# EAGLE board Pinscape Pico Expansion Board - DIY Friendly Power - SMD Sockets (EAGLE 7.7.0)
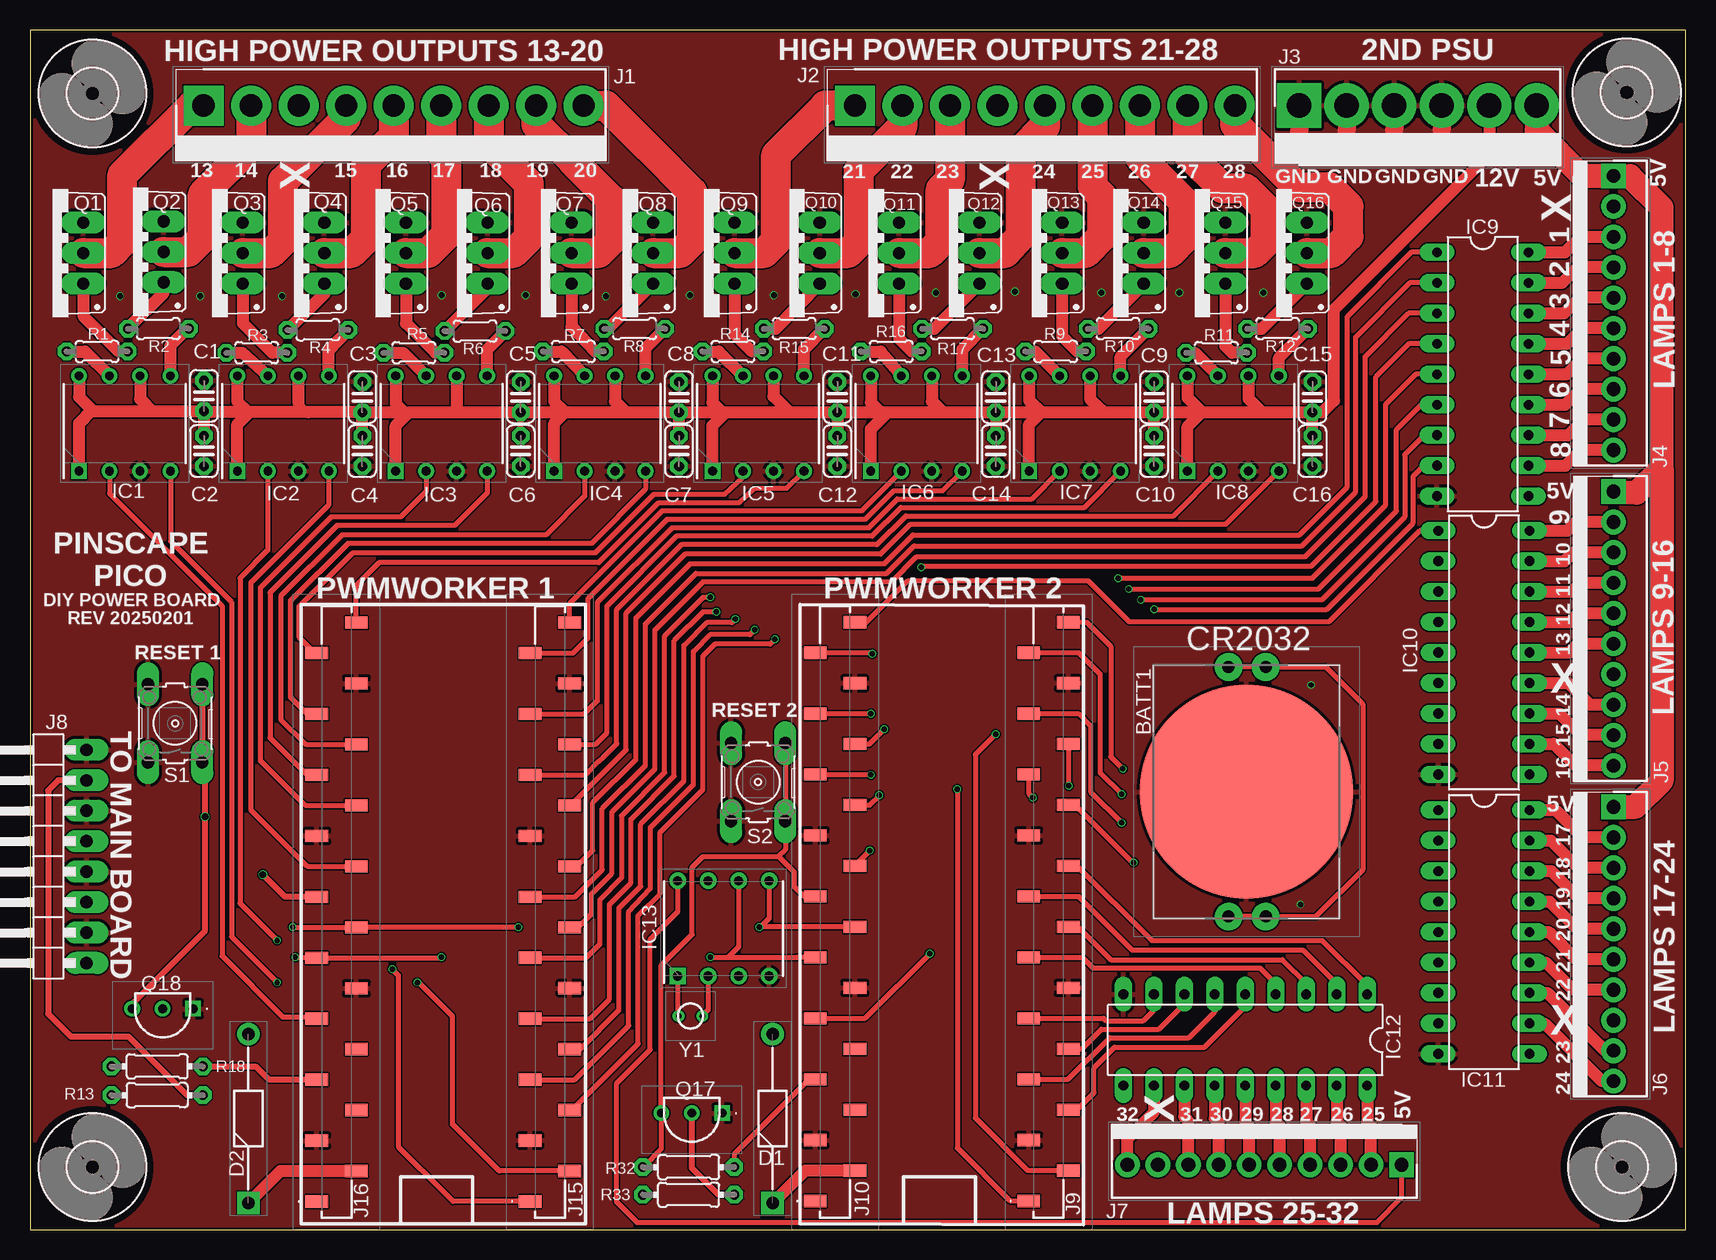
[diagram p0: board, top side]
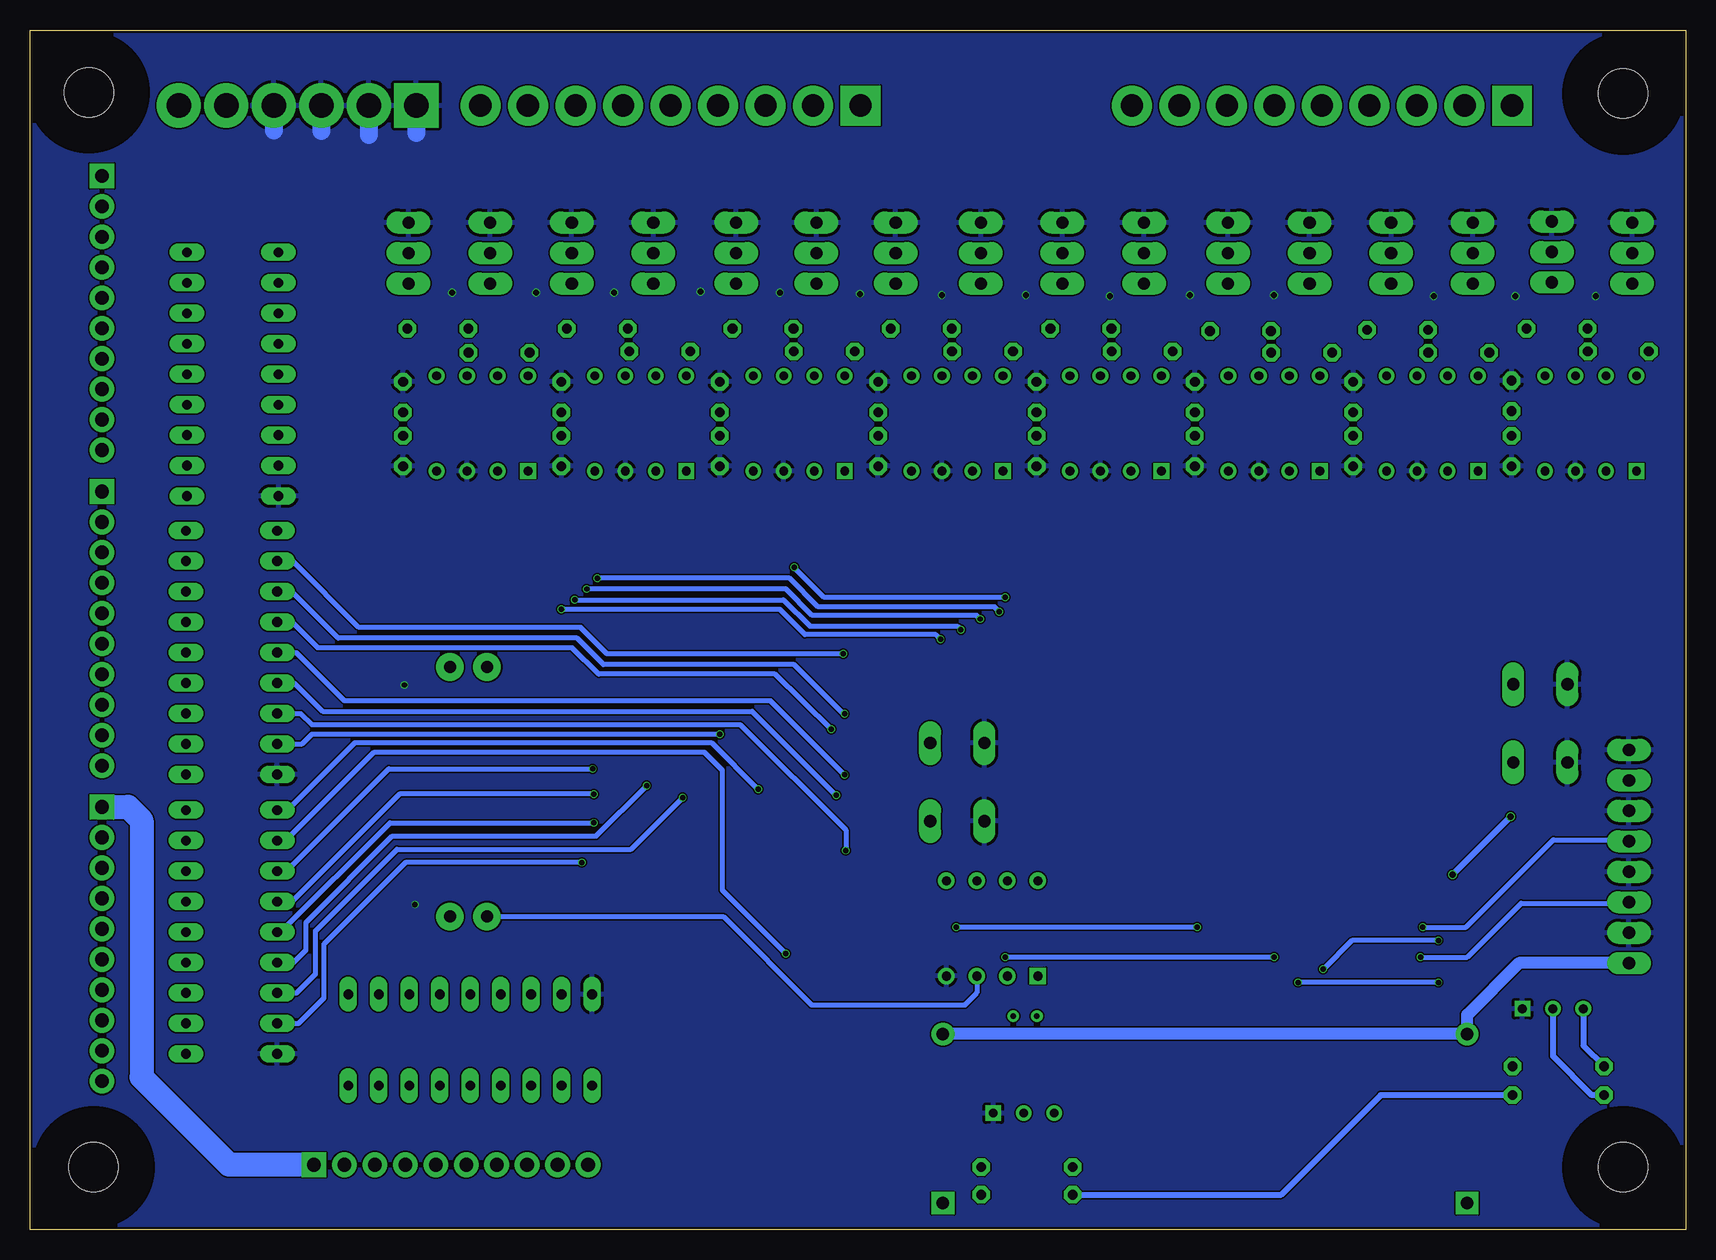
[diagram p1: board, bottom side, seen from below]

Size 138 x 100 mm. Coordinates in mm from the lower left corner, seen from the top.
Outline: 0,0 138,0 138,100 0,100 0,0
Copper layers (1*16): Top 0.035mm / dielectric 1.6mm / Bottom 0.035mm
Design rules "jlcpcb-2layers": minimum track width 5mil, minimum drill 0.3mm, track to track 5mil, track to pad 5mil, pad to pad 5mil, via to via 5mil, smd to smd 5mil, copper to edge 0.2mm, drill to drill 6mil, minimum pad ring 10mil, minimum via ring 3mil, stop-mask expansion 4mil, vias tented up to drill 0mil, thermal gap 10mil

## Footprints (pad centres in the part's own frame; a part is rotated, then mirrored left to right if it is on the bottom)
BATHLD001THM = drill 1 pad 2.3: 1 -10.4,1.5; 2 -10.4,-1.6; 3 10.4,-1.6; 4 10.4,1.5 | smd 17.8 x 17.8: 5 0,0
C025-024X044 = drill 0.813 octagon: 1 -1.27,0; 2 1.27,0
DIOAD1408W86L464D236 = drill 1.05 pad 1.575 square: 1 0,0 | drill 1.05 pad 1.575: 2 14.1,0
DIP794W53P254L959H508Q8N = drill 0.73 pad 1.13 square: 1 -3.97,3.81 | drill 0.73 pad 1.13: 2 -3.97,1.27; 3 -3.97,-1.27; 4 -3.97,-3.81; 5 3.97,-3.81; 6 3.97,-1.27; 7 3.97,1.27; 8 3.97,3.81
DIL18 = drill 0.813 long: 1 -10.16,-3.81; 2 -7.62,-3.81; 3 -5.08,-3.81; 4 -2.54,-3.81; 5 0,-3.81; 6 2.54,-3.81; 7 5.08,-3.81; 8 7.62,-3.81; 9 10.16,-3.81; 10 10.16,3.81; 11 7.62,3.81; 12 5.08,3.81; 13 2.54,3.81; 14 0,3.81; 15 -2.54,3.81; 16 -5.08,3.81; 17 -7.62,3.81; 18 -10.16,3.81
DIP794W56P254L938H457Q8N = drill 0.76 pad 1.16 square: 1 -3.97,3.81 | drill 0.76 pad 1.16: 2 -3.97,1.27; 3 -3.97,-1.27; 4 -3.97,-3.81; 5 3.97,-3.81; 6 3.97,-1.27; 7 3.97,1.27; 8 3.97,3.81
SHDR9W117P0X396_1X9_3566X762X1 = drill 1.85 pad 2.775 square: 1 15.84,0 | drill 1.85 pad 2.775: 2 11.878,0; 3 7.916,0; 4 3.954,0; 5 -0.008,0; 6 -3.97,0; 7 -7.932,0; 8 -11.894,0; 9 -15.856,0
SHDR6W183P0X396_1X6_2377X762X1 = drill 2.05 pad 3.075 square: 1 0,0 | drill 2.05 pad 3.075: 2 3.96,0; 3 7.92,0; 4 11.88,0; 5 15.84,0; 6 19.8,0
SHDR10W66P0X254_1X10_2540X572X = drill 1.15 pad 1.725 square: 1 11.43,0 | drill 1.15 pad 1.725: 2 8.89,0; 3 6.35,0; 4 3.81,0; 5 1.27,0; 6 -1.27,0; 7 -3.81,0; 8 -6.35,0; 9 -8.89,0; 10 -11.43,0
1X08/90 = drill 1.016 long: 1 -8.89,-3.81; 2 -6.35,-3.81; 3 -3.81,-3.81; 4 -1.27,-3.81; 5 1.27,-3.81; 6 3.81,-3.81; 7 6.35,-3.81; 8 8.89,-3.81
M20-7862042-B = smd 1.02 x 1.9: 1 -24.13,1.65; 2 -21.59,-1.65; 3 -19.05,1.65; 4 -16.51,-1.65; 5 -13.97,1.65; 6 -11.43,-1.65; 7 -8.89,1.65; 8 -6.35,-1.65; 9 -3.81,1.65; 10 -1.27,-1.65; 11 1.27,1.65; 12 3.81,-1.65; 13 6.35,1.65; 14 8.89,-1.65; 15 11.43,1.65; 16 13.97,-1.65; 17 16.51,1.65; 18 19.05,-1.65; 19 21.59,1.65; 20 24.13,-1.65
TO220BV = drill 1.016 long: 1 -2.54,-2.54; 2 0,-2.54; 3 2.54,-2.54
2N2222A = drill 0.72 pad 1.234 square: 1 0,0 | drill 0.72 pad 1.234: 2 2.54,0; 3 5.08,0
0204/5 = drill 0.813 pad 1.333 octagon: 1 -2.54,0; 2 2.54,0
0204/7 = drill 0.813 octagon: 1 -3.81,0; 2 3.81,0
B3F-10XX = drill 1.016 long: 1 -3.251,2.261; 2 3.251,2.261; 3 -3.251,-2.261; 4 3.251,-2.261
4,1 = hole 4.1: 0,0
ECS32712513XC = drill 0.46 pad 0.6: 1 -0.635,0; 2 1.335,0

## Placement (x,y rotation side)
BATT1  BAT-HLD-001-THM  [BATHLD001THM]  101.4,36.5 90 top
C1  100nF  [C025-024X044]  14.5,69.5 270 top
C2  4.7uF  [C025-024X044]  14.5,64.9 90 top
C3  100nF  [C025-024X044]  27.7,69.4 270 top
C4  4.7uF  [C025-024X044]  27.7,64.9 90 top
C5  100nF  [C025-024X044]  40.9,69.4 270 top
C6  4.7uF  [C025-024X044]  40.9,64.9 90 top
C7  100nF  [C025-024X044]  54.1,64.9 90 top
C8  4.7uF  [C025-024X044]  54.1,69.4 270 top
C9  100nF  [C025-024X044]  93.7,69.4 270 top
C10  4.7uF  [C025-024X044]  93.7,64.9 90 top
C11  100nF  [C025-024X044]  67.3,69.4 270 top
C12  4.7uF  [C025-024X044]  67.3,64.9 90 top
C13  100nF  [C025-024X044]  80.5,69.4 270 top
C14  4.7uF  [C025-024X044]  80.5,64.9 90 top
C15  100nF  [C025-024X044]  106.9,69.4 270 top
C16  4.7uF  [C025-024X044]  106.9,64.9 90 top
D1  SB140-T  [DIOAD1408W86L464D236]  61.9,2.2 90 top
D2  SB140-T  [DIOAD1408W86L464D236]  18.2,2.2 90 top
IC1  UCC27524P  [DIP794W53P254L959H508Q8N]  7.9,67.2 90 top
IC2  UCC27524P  [DIP794W53P254L959H508Q8N]  21.1,67.2 90 top
IC3  UCC27524P  [DIP794W53P254L959H508Q8N]  34.3,67.2 90 top
IC4  UCC27524P  [DIP794W53P254L959H508Q8N]  47.5,67.2 90 top
IC5  UCC27524P  [DIP794W53P254L959H508Q8N]  60.7,67.2 90 top
IC6  UCC27524P  [DIP794W53P254L959H508Q8N]  73.9,67.2 90 top
IC7  UCC27524P  [DIP794W53P254L959H508Q8N]  87.1,67.2 90 top
IC8  UCC27524P  [DIP794W53P254L959H508Q8N]  100.3,67.2 90 top
IC9  ULN2803A  [DIL18]  121.1,71.3 270 top
IC10  ULN2803A  [DIL18]  121.2,48.1 270 top
IC11  ULN2803A  [DIL18]  121.2,24.8 270 top
IC12  ULN2803A  [DIL18]  101.3,15.8 180 top
IC13  DS1307+  [DIP794W56P254L938H457Q8N]  57.8,25.1 90 top
J1  640445-9  [SHDR9W117P0X396_1X9_3566X762X1]  30.3,93.7 180 top
J2  640445-9  [SHDR9W117P0X396_1X9_3566X762X1]  84.6,93.7 180 top
J3  640445-6  [SHDR6W183P0X396_1X6_2377X762X1]  105.8,93.7 0 top
J4  1-640456-0  [SHDR10W66P0X254_1X10_2540X572X]  132,76.4 90 top
J5  1-640456-0  [SHDR10W66P0X254_1X10_2540X572X]  132,50.1 90 top
J6  1-640456-0  [SHDR10W66P0X254_1X10_2540X572X]  132,23.8 90 top
J7  1-640456-0  [SHDR10W66P0X254_1X10_2540X572X]  102.9,5.4 0 top
J8  [1X08/90]  0.9,31.1 90 top
J9  M20-7862042B  [M20-7862042-B]  84.9,26.5 90 top
J10  M20-7862042B  [M20-7862042-B]  67.11,26.5 90 top
J15  M20-7862042B  [M20-7862042-B]  43.33,26.47 90 top
J16  M20-7862042B  [M20-7862042-B]  25.56,26.46 90 top
Q1  FDPF085N10A  [TO220BV]  1.9,81.4 90 top
Q2  FDPF085N10A  [TO220BV]  8.6,81.5 90 top
Q3  FDPF085N10A  [TO220BV]  15.2,81.4 90 top
Q4  FDPF085N10A  [TO220BV]  22,81.4 90 top
Q5  FDPF085N10A  [TO220BV]  28.8,81.4 90 top
Q6  FDPF085N10A  [TO220BV]  35.6,81.4 90 top
Q7  FDPF085N10A  [TO220BV]  42.6,81.4 90 top
Q8  FDPF085N10A  [TO220BV]  49.4,81.4 90 top
Q9  FDPF085N10A  [TO220BV]  56.2,81.4 90 top
Q10  FDPF085N10A  [TO220BV]  63.3,81.4 90 top
Q11  FDPF085N10A  [TO220BV]  69.9,81.4 90 top
Q12  FDPF085N10A  [TO220BV]  76.6,81.4 90 top
Q13  FDPF085N10A  [TO220BV]  83.5,81.4 90 top
Q14  FDPF085N10A  [TO220BV]  90.3,81.4 90 top
Q15  FDPF085N10A  [TO220BV]  97.1,81.4 90 top
Q16  FDPF085N10A  [TO220BV]  103.9,81.4 90 top
Q17  2N2222A  [2N2222A]  57.7,9.7 180 top
Q18  2N2222A  [2N2222A]  13.6,18.4 180 top
R1  4R7  [0204/5]  5.6,73.2 0 top
R2  4R7  [0204/5]  10.7,75.1 180 top
R3  4R7  [0204/5]  18.9,73.1 0 top
R4  4R7  [0204/5]  24,75 180 top
R5  4R7  [0204/5]  32,73.1 0 top
R6  4R7  [0204/5]  37.1,74.9 180 top
R7  4R7  [0204/5]  45.3,73.2 0 top
R8  4R7  [0204/5]  50.4,75.1 180 top
R9  4R7  [0204/5]  85.5,73.2 0 top
R10  4R7  [0204/5]  90.7,75.1 180 top
R11  4R7  [0204/5]  98.9,73.1 0 top
R12  4R7  [0204/5]  104,75.1 180 top
R13  2.2k  [0204/7]  10.6,11.2 180 top
R14  4R7  [0204/5]  58.6,73.2 0 top
R15  4R7  [0204/5]  63.7,75.1 180 top
R16  4R7  [0204/5]  71.8,73.2 0 top
R17  4R7  [0204/5]  76.9,75.1 180 top
R18  4.7K  [0204/7]  10.6,13.6 0 top
R32  4.7K  [0204/7]  54.9,5.2 0 top
R33  2.2k  [0204/7]  54.9,2.9 0 top
S1  [B3F-10XX]  12.1,42.2 90 top
S2  [B3F-10XX]  60.7,37.3 90 top
U$1  [4,1]  5.2,94.7 0 top
U$2  [4,1]  133.1,94.8 0 top
U$3  [4,1]  132.7,5.2 0 top
U$4  [4,1]  5.2,5.2 0 top
Y1  ECS-.327-12.5-13X-C  [ECS32712513XC]  54.7,17.8 0 top

## Library data of the parts
BATT1 = SamacSys_Parts; DESCRIPTION: Coin Cell Battery Holders Bat Hld CR2032/2025 Through-hole Mount; HEIGHT: 4.2mm; MANUFACTURER_NAME: Linx Technologies; MANUFACTURER_PART_NUMBER: BAT-HLD-001-THM; MOUSER_PART_NUMBER: 712-BAT-HLD-001-THM; MOUSER_PRICE-STOCK: https://www.mouser.com/Search/Refine.aspx?Keyword=712-BAT-HLD-001-THM
C1 C3 C5 C7 C9 C11 C13 C15 = rcl; PARTNO: 21RZ310-RC
C2 C4 C6 C8 C10 C12 C14 C16 = rcl; PARTNO: 810-FG14X5R1H475KRT0
D1 D2 = SamacSys_Parts; DESCRIPTION: Schottky Diodes & Rectifiers 1.0A 40V; HEIGHT: mm; MANUFACTURER_NAME: Diodes Incorporated; MANUFACTURER_PART_NUMBER: SB140-T; MOUSER_PART_NUMBER: 621-SB140-T; MOUSER_PRICE-STOCK: https://www.mouser.co.uk/ProductDetail/Diodes-Incorporated/SB140-T?qs=sxN%252BoM2fis8H2rSIUCd%252Bfg%3D%3D
IC1-IC8 = SamacSys_Parts; DESCRIPTION: Dual, 5A, High-Speed Low-Side Power MOSFET Driver; HEIGHT: 5.08mm; MANUFACTURER_NAME: Texas Instruments; MANUFACTURER_PART_NUMBER: UCC27524P; MOUSER_PART_NUMBER: 595-UCC27524P; MOUSER_PRICE-STOCK: https://www.mouser.co.uk/ProductDetail/Texas-Instruments/UCC27524P?qs=iuXUNOC6nYeLYu3RiGlNsQ%3D%3D
IC9-IC12 = uln-udn
IC13 = SamacSys_Parts; DESCRIPTION: Real time clock,DS1307 56B RAM DIP8 Maxim DS1307+ Real Time Clock, Alarm, Calendar, Clock, 56B RAM, I2C, 5.5 V, 8-Pin PDIP; HEIGHT: 4.572mm; MANUFACTURER_NAME: Analog Devices; MANUFACTURER_PART_NUMBER: DS1307+; MOUSER_PART_NUMBER: 700-DS1307; MOUSER_PRICE-STOCK: https://www.mouser.co.uk/ProductDetail/Analog-Devices-Maxim-Integrated/DS1307%2b?qs=0Y9aZN%252BMVCVfCMpmynAtEg%3D%3D
J1 J2 = SamacSys_Parts; DESCRIPTION: Header,MTA156,straight,3.96mm,9way; HEIGHT: 13.716mm; MANUFACTURER_NAME: TE Connectivity; MANUFACTURER_PART_NUMBER: 640445-9; MOUSER_PART_NUMBER: 571-6404459; MOUSER_PRICE-STOCK: https://www.mouser.co.uk/ProductDetail/TE-Connectivity/640445-9?qs=P8zzrVhehauUywCYO3wBKg%3D%3D
J3 = SamacSys_Parts; DESCRIPTION: 6 way friction lock header,3.96mm pitch; HEIGHT: 11.049mm; MANUFACTURER_NAME: TE Connectivity; MANUFACTURER_PART_NUMBER: 640445-6; MOUSER_PART_NUMBER: 571-6404456; MOUSER_PRICE-STOCK: https://www.mouser.com/Search/Refine.aspx?Keyword=571-6404456
J4-J7 = SamacSys_Parts; DESCRIPTION: 10 way MTA straight friction lock header; HEIGHT: 10.414mm; MANUFACTURER_NAME: TE Connectivity; MANUFACTURER_PART_NUMBER: 1-640456-0; MOUSER_PART_NUMBER: 571-16404560; MOUSER_PRICE-STOCK: https://www.mouser.co.uk/ProductDetail/TE-Connectivity-AMP/1-640456-0?qs=%2F35zJ5USjomFMMbv03PGrg%3D%3D
J8 = pinhead
J9 J10 J15 J16 = SamacSys_Parts
Q1-Q16 = BUK7575; PARTNO: FDPF085N10A
Q17 Q18 = SamacSys_Parts; DESCRIPTION: NPN General purpose transistor . IC 150 mA . f 100 MHz; HEIGHT: 7.5mm; MANUFACTURER_NAME: Diotec; MANUFACTURER_PART_NUMBER: 2N2222A; MOUSER_PART_NUMBER: 637-2N2222A; MOUSER_PRICE-STOCK: https://www.mouser.co.uk/ProductDetail/Diotec-Semiconductor/2N2222A?qs=OlC7AqGiEDmNlRSTGL2dYg%3D%3D
R1-R18 R32 R33 = resistor; PARTNO: 660-MFS1/4DCT52R47R0
S1 S2 = switch-omron; MPN: B3F-1000; OC_FARNELL: 176432; OC_NEWARK: 36M3542
U$1-U$4 = holes
Y1 = SamacSys_Parts; DESCRIPTION: Crystals CRYSTAL 32.768 kHZ 12.5 PF SMD, ESR 35K Ohms, +/-10ppm -20 C 70 C, 2.1 x 6.2 1 uw Max +/- 3 ppm 1st Year Aging Max; HEIGHT: 6.2mm; MANUFACTURER_NAME: ECS; MANUFACTURER_PART_NUMBER: ECS-.327-12.5-13X-C; MOUSER_PART_NUMBER: 520-S-.32712.513XC; MOUSER_PRICE-STOCK: https://www.mouser.co.uk/ProductDetail/ECS/ECS-.327-12.5-13X-C?qs=zW32dvEIR3sSXlfaut3cdQ%3D%3D

## Nets
5V: IC13.8 J3.6 J4.1 J5.1 J6.1 J7.1
12V: C1.2 C2.2 C3.2 C4.2 C5.2 C6.2 C7.2 C8.2 C9.2 C10.2 C11.2 C12.2 C13.2 C14.2 C15.2 C16.2 IC1.1 IC1.6 IC1.8 IC2.1 IC2.6 IC2.8 IC3.1 IC3.6 IC3.8 IC4.1 IC4.6 IC4.8 IC5.1 IC5.6 IC5.8 IC6.1 IC6.6 IC6.8 IC7.1 IC7.6 IC7.8 IC8.1 IC8.6 IC8.8 J3.5
/PERIPHERAL_POWER_ENABLE: J8.7 R13.1 R33.1
GND: BATT1.5 C1.1 C2.1 C3.1 C4.1 C5.1 C6.1 C7.1 C8.1 C9.1 C10.1 C11.1 C12.1 C13.1 C14.1 C15.1 C16.1 IC1.3 IC2.3 IC3.3 IC4.3 IC5.3 IC6.3 IC7.3 IC8.3 IC9.9 IC10.9 IC11.9 IC12.9 IC13.4 J3.1 J3.2 J3.3 J3.4 J8.2 J8.4 J8.6 J8.8 J9.3 J9.8 J9.13 J9.18 J10.3 J10.8 J10.13 J10.18 J15.3 J15.8 J15.13 J15.18 J16.3 J16.8 J16.13 J16.18 Q1.3 Q2.3 Q3.3 Q4.3 Q5.3 Q6.3 Q7.3 Q8.3 Q9.3 Q10.3 Q11.3 Q12.3 Q13.3 Q14.3 Q15.3 Q16.3 Q17.1 Q18.1 S1.1 S1.2 S2.1 S2.2
LAMPCTL1: IC9.1 J15.12
LAMPCTL2: IC9.2 J15.11
LAMPCTL3: IC9.3 J15.10
LAMPCTL4: IC9.4 J15.9
LAMPCTL5: IC9.5 J15.7
LAMPCTL6: IC9.6 J15.6
LAMPCTL7: IC9.7 J15.5
LAMPCTL8: IC9.8 J15.4
LAMPCTL9: IC10.1 J10.20
LAMPCTL10: IC10.2 J10.19
LAMPCTL11: IC10.3 J10.17
LAMPCTL12: IC10.4 J10.16
LAMPCTL13: IC10.5 J10.15
LAMPCTL14: IC10.6 J10.14
LAMPCTL15: IC10.7 J10.12
LAMPCTL16: IC10.8 J9.2
LAMPCTL17: IC11.1 J9.1
LAMPCTL18: IC11.2 J10.7
LAMPCTL19: IC11.3 J9.20
LAMPCTL20: IC11.4 J9.19
LAMPCTL21: IC11.5 J9.17
LAMPCTL22: IC11.6 J9.16
LAMPCTL23: IC11.7 J9.15
LAMPCTL24: IC11.8 J9.14
LAMPCTL25: IC12.1 J9.12
LAMPCTL26: IC12.2 J9.11
LAMPCTL27: IC12.3 J9.10
LAMPCTL28: IC12.4 J9.9
LAMPCTL29: IC12.5 J9.4
LAMPCTL30: IC12.6 J9.5
LAMPCTL31: IC12.7 J9.6
LAMPCTL32: IC12.8 J9.7
N$1: IC1.7 R1.1
N$2: IC1.5 R2.1
N$3: Q1.1 R1.2
N$4: Q2.1 R2.2
N$5: IC2.7 R3.1
N$6: IC2.5 R4.1
N$7: Q3.1 R3.2
N$8: Q4.1 R4.2
N$9: IC3.7 R5.1
N$10: IC3.5 R6.1
N$11: Q5.1 R5.2
N$12: Q6.1 R6.2
N$13: IC4.7 R7.1
N$14: IC4.5 R8.1
N$15: Q7.1 R7.2
N$16: Q8.1 R8.2
N$17: D1.1 J10.2
N$18: D2.1 J16.2
N$19: IC5.7 R14.1
N$20: IC5.5 R15.1
N$21: IC7.7 R9.1
N$22: IC7.5 R10.1
N$23: Q13.1 R9.2
N$24: Q14.1 R10.2
N$25: Q9.1 R14.2
N$26: Q10.1 R15.2
N$27: IC6.7 R16.1
N$28: IC6.5 R17.1
N$29: Q11.1 R16.2
N$30: Q12.1 R17.2
N$31: IC8.7 R11.1
N$32: IC8.5 R12.1
N$33: Q15.1 R11.2
N$34: Q16.1 R12.2
N$35: BATT1.1 BATT1.2 BATT1.3 BATT1.4 IC13.3
N$36: IC13.1 Y1.1
N$37: IC13.2 Y1.2
N$38: J10.5 R32.2
N$39: Q17.2 R33.2
N$40: J10.11 Q17.3 R32.1 S2.3 S2.4
N$41: J16.5 R18.2
N$42: Q18.2 R13.2
N$43: IC12.18 J7.2
N$44: IC12.17 J7.3
N$45: IC12.16 J7.4
N$46: IC12.15 J7.5
N$47: IC12.14 J7.6
N$48: IC12.13 J7.7
N$49: IC12.12 J7.8
N$50: IC12.11 J7.10
N$51: J16.11 Q18.3 R18.1 S1.3 S1.4
N$59: IC11.18 J6.2
N$60: IC11.17 J6.3
N$61: IC11.16 J6.4
N$62: IC11.15 J6.5
N$63: IC11.14 J6.6
N$64: IC11.13 J6.7
N$65: IC11.12 J6.9
N$66: IC11.11 J6.10
N$67: IC9.18 J4.3
N$68: IC9.17 J4.4
N$69: IC9.16 J4.5
N$70: IC9.15 J4.6
N$71: IC9.14 J4.7
N$72: IC9.13 J4.8
N$73: IC9.12 J4.9
N$74: IC9.11 J4.10
N$75: IC10.18 J5.2
N$76: IC10.17 J5.3
N$77: IC10.16 J5.4
N$78: IC10.15 J5.5
N$79: IC10.14 J5.6
N$80: IC10.13 J5.8
N$81: IC10.12 J5.9
N$82: IC10.11 J5.10
OUT13: J1.1 Q1.2
OUT14: J1.2 Q2.2
OUT15: J1.4 Q3.2
OUT16: J1.5 Q4.2
OUT17: J1.6 Q5.2
OUT18: J1.7 Q6.2
OUT19: J1.8 Q7.2
OUT20: J1.9 Q8.2
OUT21: J2.1 Q9.2
OUT22: J2.2 Q10.2
OUT23: J2.3 Q11.2
OUT24: J2.5 Q12.2
OUT25: J2.6 Q13.2
OUT26: J2.7 Q14.2
OUT27: J2.8 Q15.2
OUT28: J2.9 Q16.2
OUTCTL13: IC1.2 J16.7
OUTCTL14: IC1.4 J15.2
OUTCTL15: IC2.2 J15.1
OUTCTL16: IC2.4 J16.12
OUTCTL17: IC3.2 J16.14
OUTCTL18: IC3.4 J16.15
OUTCTL19: IC4.2 J16.16
OUTCTL20: IC4.4 J16.17
OUTCTL21: IC5.2 J16.19
OUTCTL22: IC5.4 J16.20
OUTCTL23: IC6.2 J15.20
OUTCTL24: IC6.4 J15.19
OUTCTL25: IC7.2 J15.17
OUTCTL26: IC7.4 J15.16
OUTCTL27: IC8.2 J15.15
OUTCTL28: IC8.4 J15.14
SCL: IC13.6 J8.3 J10.9 J16.9
SDA: IC13.5 J8.5 J10.10 J16.10
VBUS: D1.2 D2.2 J8.1

## Tracks (layer width: path | path; a pad name or v marks a point on that pad's centre or on a via)
5V
  Top 0.4: J7.1 114.33,2.63 112.3,0.6 50.6,0.6 48.9,2.3 48.9,12.2 51.7,15 51.7,24.2 53.99,26.49 IC13.8
  Top 2: J5.1 133.93,61.43 136,63.5 | 136,63.5 136,85.2 133.37,87.83 J4.1 129.4,87.83 125.6,91.63 J3.6 | 136,63.5 136,37.4 133.83,35.23 J6.1
  Bottom 2: J6.1 129.83,35.23 128.7,34.1 128.7,12.7 121.4,5.4 J7.1
12V
  Top 0.406: 14.47,68.2 C1.2 | 14.47,66.2 C2.2
  Top 0.5: 5.29,68.2 5.2,68.3 | 18.3,68.13 18.2,68.13 | 14.6,68.13 C1.2 | 22.37,68.96 23.2,68.13 | 31.2,68.13 31.6,68.13 | C6.2 C5.2 | 35.57,68.66 36.1,68.13
  Top 1: IC1.8 4.09,69.4 5.2,68.3 4.09,67.19 IC1.1 | 10.2,68.2 14.47,68.2 14.47,66.2 | 10.2,68.2 5.29,68.2 | C3.2 23.2,68.13 18.3,68.13 17.29,67.12 IC2.1 | 14.6,68.13 18.2,68.13 17.29,69.04 IC2.8 | IC1.6 9.17,69.23 10.2,68.2 | IC2.6 22.37,68.96 | C4.2 C3.2 | C3.2 31.2,68.13 30.49,68.84 IC3.8 | 44.6,68.13 C5.2 36.1,68.13 31.6,68.13 30.49,67.02 IC3.1 | 44.6,68.13 49.7,68.13 | 49.7,68.13 C8.2 | C7.2 C8.2 | IC4.6 48.77,69.06 49.7,68.13 | IC4.8 43.69,69.04 44.6,68.13 | IC3.6 35.57,68.66 | IC4.1 43.69,67.22 44.6,68.13 | C8.2 57.7,68.13 | 57.7,68.13 58,68.13 | 58,68.13 63.3,68.13 | 63.3,68.13 C11.2 | C11.2 C12.2 | IC5.6 61.97,69.46 63.3,68.13 | IC5.8 56.89,68.94 57.7,68.13 | IC5.1 56.89,67.02 58,68.13 | C11.2 70.9,68.13 | 70.9,68.13 71.5,68.13 | 71.5,68.13 76.1,68.13 | 76.1,68.13 C13.2 | IC6.8 70.09,68.94 70.9,68.13 | IC6.6 75.17,69.06 76.1,68.13 | IC6.1 70.09,66.72 71.5,68.13 | C13.2 C14.2 | C13.2 84.3,68.13 | 84.3,68.13 89.5,68.13 | 89.5,68.13 C9.2 | C9.2 97.7,68.13 | 97.7,68.13 102.7,68.13 | 102.7,68.13 C15.2 | C16.2 C15.2 | C10.2 C9.2 | IC7.8 83.29,69.14 84.3,68.13 | IC7.6 88.37,69.23 88.9,68.7 88.93,68.7 89.5,68.13 | IC7.1 83.29,67.12 84.3,68.13 | IC8.1 96.49,66.92 97.7,68.13 | IC8.8 96.49,69.34 97.7,68.13 | IC8.6 101.57,69.26 102.7,68.13 | C15.2 107.73,68.13 108.7,69.1 108.7,76.7 120.95,88.95 121.28,89.28 121.64,89.64 J3.5
/PERIPHERAL_POWER_ENABLE
  Top 0.5: J8.7 2.35,37.45 1.5,36.6 1.5,18 3.4,16.1 8.2,16.1 13.1,11.2 R13.1
  Bottom 0.5: R33.1 33.7,2.9 25.4,11.2 R13.1
GND  (via drill 0.45, 0.5)
  Top 1.5: J3.1 105.8,91.6 | J3.2 109.76,91.64 | J3.3 113.72,91.68 | J3.4 117.68,91.72
  Bottom 1.5: J3.1 105.8,91.4 | J3.2 109.76,91.24 | J3.3 113.72,91.58 | J3.4 117.68,91.62
  other vias: 7.5,77.8 14.2,77.8 21,77.8 34.3,77.9 48,77.8 62,77.9 41.3,77.9 55,77.9 68.8,78 75.5,78.1 82.1,78.2 89.3,78.1 95.8,78.1 102.8,78.1 106.8,45.4 105.9,27.1
  pour Top: 0.2,99.8 138.1,99.8 138.1,-0.2 0.2,-0.2
  pour Bottom: 0.2,99.8 138,99.7 138,0.2 0.2,0.2
LAMPCTL1
  Top 0.4: IC9.1 115.16,81.46 109.8,76.1 109.8,61.9 105.8,57.9 73.6,57.9 71.2,55.5 55,55.5 50.5,51 50.5,39.2 46.9,35.6 46.9,31.6 45.58,30.28 J15.12
LAMPCTL2
  Top 0.4: IC9.2 115.02,78.92 110.5,74.4 110.5,61.5 106,57 73.7,57 71.4,54.7 55.5,54.7 51.3,50.5 51.3,38.7 47.7,35.1 47.7,30 45.44,27.74 J15.11
LAMPCTL3
  Top 0.4: IC9.3 114.9,76.38 111.3,72.78 111.3,61.1 106.3,56.1 73.9,56.1 71.8,54 56.1,54 52.1,50 52.1,38.4 48.5,34.8 48.5,29.7 46.8,28 46.8,26.3 45.7,25.2 J15.10
LAMPCTL4  (via drill 0.45)
  Top 0.4: v74.3,55.2 74.4,55.3 106.8,55.3 112.2,60.7 112.2,71.1 114.94,73.84 IC9.4 | v56.7,52.7 56.1,52.7 52.9,49.5 52.9,38.1 49.3,34.5 49.3,29.3 47.5,27.5 47.5,23.8 46.36,22.66 J15.9
  Bottom 0.4: v56.7,52.7 71.8,52.7 v74.3,55.2
LAMPCTL5  (via drill 0.45)
  Top 0.4: v90.7,54.3 106.9,54.3 113,60.4 113,68.8 115.5,71.3 IC9.5 | v57.2,51.5 56.1,51.5 53.7,49.1 53.7,37.8 50.1,34.2 50.1,28.9 48.3,27.1 48.3,19.2 46.68,17.58 J15.7
  Bottom 0.4: v90.7,54.3 74.7,54.3 72.3,51.9 57.6,51.9 v57.2,51.5
LAMPCTL6  (via drill 0.45)
  Top 0.4: v91.6,53.4 107.4,53.4 113.9,59.9 113.9,66.7 115.96,68.76 IC9.6 | v58.8,50.9 58.5,50.6 56.4,50.6 54.5,48.7 54.5,37.4 50.9,33.8 50.9,28.6 49.1,26.8 49.1,18.3 45.84,15.04 J15.6
  Bottom 0.4: v91.6,53.4 75,53.4 72.8,51.2 59.1,51.2 v58.8,50.9
LAMPCTL7  (via drill 0.45)
  Top 0.4: IC9.7 116.22,66.22 114.6,64.6 114.6,59.4 107.7,52.5 v92.6,52.5 | v60.4,50 60,49.6 56.7,49.6 55.3,48.2 55.3,37.1 51.7,33.5 51.7,28.4 49.9,26.5 49.9,17 45.4,12.5 J15.5
  Bottom 0.4: v92.6,52.5 75.2,52.5 73,50.3 60.7,50.3 v60.4,50
LAMPCTL8  (via drill 0.45)
  Top 0.4: v93.7,51.7 108.1,51.7 115.3,58.9 115.3,62.8 116.18,63.68 IC9.8 | 45.56,9.96 45.56,10.2 | 45.56,10.2 45.56,10.36 50.7,15.5 50.7,26.2 52.5,28 52.5,33.1 56.1,36.7 56.1,47.8 57.1,48.8 61.7,48.8 v62.1,49.2 | J15.4 45.32,9.96 45.56,10.2
  Bottom 0.4: v62.1,49.2 62.5,49.6 73.4,49.6 75.5,51.7 v93.7,51.7
LAMPCTL9
  Top 0.4: IC10.1 115.86,58.26 108.3,50.7 91.6,50.7 88.2,54.1 73.2,54.1 69.73,50.63 J10.20
LAMPCTL10  (via drill 0.45)
  Top 0.4: J10.19 70.11,48.09 v70.2,48
  Bottom 0.4: v70.2,48 89.9,48 92.1,50.2 110.6,50.2 116.12,55.72 IC10.2
LAMPCTL11  (via drill 0.45)
  Top 0.4: J10.17 v70.09,43.01 v70.1,43
  Bottom 0.4: v70.1,43 70.2,43 74.3,47.1 90.2,47.1 92.4,49.3 112.3,49.3 116.18,53.18 IC10.3
LAMPCTL12  (via drill 0.45)
  Top 0.4: J10.16 69.97,40.47 v71.2,41.7
  Bottom 0.4: IC10.4 116.14,50.64 114,48.5 92.8,48.5 90.6,46.3 75.9,46.3 v71.2,41.7
LAMPCTL13  (via drill 0.45)
  Top 0.4: J10.15 70.07,37.93 v70.1,37.9
  Bottom 0.4: v70.1,37.9 76.3,44.1 111.8,44.1 115.8,48.1 IC10.5
LAMPCTL14  (via drill 0.45)
  Top 0.4: J10.14 69.99,35.39 v70.8,36.2
  Bottom 0.4: v70.8,36.2 77.8,43.2 113.6,43.2 115.96,45.56 IC10.6
LAMPCTL15  (via drill 0.45)
  Top 0.4: J10.12 68.76,30.36 v70,31.6
  Bottom 0.4: IC10.7 115.42,43.02 114.5,42.1 78.8,42.1 70,33.3 v70,31.6
LAMPCTL16  (via drill 0.45)
  Top 0.4: v80.5,41.3 78.8,39.6 78.8,9.3 83.19,4.91 J9.2
  Bottom 0.4: IC10.8 115.32,40.48 114.5,41.3 v80.5,41.3
LAMPCTL17  (via drill 0.45)
  Top 0.4: v77.3,36.7 77.3,6.8 81.73,2.37 J9.1
  Bottom 0.4: IC11.1 116.54,34.96 110.9,40.6 81.2,40.6 v77.3,36.7
LAMPCTL18  (via drill 0.45)
  Top 0.4: v75,23 69.61,17.61 J10.7
  Bottom 0.4: IC11.2 116.68,32.42 109.3,39.8 81.8,39.8 80.3,38.3 80.3,28.3 v75,23
LAMPCTL19  (via drill 0.45)
  Top 0.4: v91.1,38.4 90.1,39.4 90.1,48.6 88.07,50.63 J9.20
  Bottom 0.4: IC11.3 116.62,29.88 108.1,38.4 v91.1,38.4
LAMPCTL20  (via drill 0.45)
  Top 0.4: v91,36.3 89.2,38.1 89.2,46.3 87.41,48.09 J9.19
  Bottom 0.4: v91,36.3 107.2,36.3 116.16,27.34 IC11.4
LAMPCTL21  (via drill 0.45)
  Top 0.4: v91,33.9 88.4,36.5 88.4,42 87.39,43.01 J9.17
  Bottom 0.4: IC11.5 117.1,24.8 108,33.9 v91,33.9
LAMPCTL22  (via drill 0.45)
  Top 0.4: J9.16 86.55,37.05 v86.6,37
  Bottom 0.4: IC11.6 116.04,22.26 115,23.3 115,25.6 107.8,32.8 90.8,32.8 v86.6,37
LAMPCTL23  (via drill 0.45)
  Top 0.4: v83.6,36 83.23,36.37 83.23,37.93 J9.15
  Bottom 0.4: IC11.7 115.78,19.72 114.2,21.3 114.2,24.9 107.4,31.7 87.9,31.7 v83.6,36
LAMPCTL24  (via drill 0.45)
  Top 0.4: v92,30.6 91.9,30.6 87.11,35.39 J9.14
  Bottom 0.4: v92,30.6 106.7,30.6 113.5,23.8 113.5,19.3 115.62,17.18 IC11.8
LAMPCTL25
  Top 0.4: IC12.1 111.46,20.34 107.7,24.1 93.5,24.1 87.29,30.31 J9.12
LAMPCTL26
  Top 0.4: IC12.2 108.92,20.48 106.1,23.3 91.87,23.3 87.4,27.77 J9.11
LAMPCTL27
  Top 0.4: IC12.3 106.38,20.52 104.4,22.5 90.1,22.5 87.37,25.23 J9.10
LAMPCTL28
  Top 0.4: IC12.4 103.84,20.46 102.5,21.8 88.6,21.8 87.71,22.69 J9.9
LAMPCTL29
  Top 0.4: IC12.5 101.3,18.6 97.9,15.2 90.4,15.2 88.7,13.5 88.7,11.4 87.29,9.99 J9.4
LAMPCTL30
  Top 0.4: IC12.6 98.76,18.16 96.6,16 90,16 86.53,12.53 J9.5
LAMPCTL31
  Top 0.4: 96.22,19.32 IC12.7 96.22,18.82 94.1,16.7 89.3,16.7 87.67,15.07 J9.6
LAMPCTL32
  Top 0.4: IC12.8 93.68,18.28 92.8,17.4 89.7,17.4 89.49,17.61 J9.7
N$1
  Top 1: R1.1 4.6,73.2 IC1.7
N$2
  Top 1: R2.1 13.1,75.1 11.7,73.7 IC1.5
N$3
  Top 1: R1.2 7.4,73.2 4.44,76.16 Q1.1
N$4
  Top 1: R2.2 11.14,78.08 Q2.1
N$5
  Top 1: R3.1 17.7,73.1 IC2.7
N$6
  Top 1: IC2.5 24.91,73.27 R4.1
N$7
  Top 1: R3.2 20.2,73.1 17.74,75.56 Q3.1
N$8
  Top 1: R4.2 24.54,77.98 Q4.1
N$9
  Top 1: R5.1 31.1,73.1 IC3.7
N$10
  Top 1: IC3.5 38.11,73.37 R6.1
N$11
  Top 1: R5.2 33.8,73.1 31.34,75.56 Q5.1
N$12
  Top 1: Q6.1 38.14,78.48 R6.2
N$13
  Top 1: R7.1 44.3,73.2 IC4.7
N$14
  Top 1: IC4.5 51.31,73.47 R8.1
N$15
  Top 1: Q7.1 45.14,75.26 47.1,73.2 R7.2
N$16
  Top 1: R8.2 48.18,75.1 Q8.1
N$17
  Top 1: D1.1 64.61,4.91 J10.2
N$18
  Top 1: J16.2 20.87,4.87 D2.1
N$19
  Top 1: R14.1 57.4,73.2 IC5.7
N$20
  Top 1: IC5.5 64.51,73.37 R15.1
N$21
  Top 1: R9.1 83.8,73.2 IC7.7
N$22
  Top 1: IC7.5 90.91,72.77 R10.1
N$23
  Top 1: Q13.1 86.04,74.46 87.3,73.2 R9.2
N$24
  Top 1: R10.2 89.08,75.1 Q14.1
N$25
  Top 1: Q9.1 58.74,74.66 60.2,73.2 R14.2
N$26
  Top 1: R15.2 62.18,75.1 Q10.1
N$27
  Top 1: R16.1 70.9,73.2 IC6.7
N$28
  Top 1: IC6.5 77.71,73.37 R17.1
N$29
  Top 1: R16.2 73.5,73.2 72.44,74.26 Q11.1
N$30
  Top 1: R17.2 75.38,75.1 Q12.1
N$31
  Top 1: R11.1 97.1,73.1 IC8.7
N$32
  Top 1: IC8.5 104.11,72.67 R12.1
N$33
  Top 1: Q15.1 99.64,73.66 100.2,73.1 R11.2
N$34
  Top 1: R12.2 102.68,75.1 Q16.1
N$35
  Top 0.4: BATT1.1 BATT1.2 107.2,26.1 111.1,30 111.1,43.8 108,46.9 BATT1.3 BATT1.4
  Bottom 0.4: BATT1.1 80.2,26.1 72.8,18.7 60.1,18.7 59.07,19.73 IC13.3
N$36
  Top 0.4: IC13.1 53.99,17.88 Y1.1
N$37
  Top 0.4: IC13.2 56.53,18.3 Y1.2
N$38
  Top 0.4: R32.2 58.71,6.31 64.93,12.53 J10.5
N$39
  Top 0.5: Q17.2 55.16,5.14 57.4,2.9 R33.2
N$40
  Top 0.4: R32.1 52.62,6.73 Q17.3 52.62,22.02 55.2,24.6 55.2,30.2 56.1,31.1 62.4,31.1 | 62.4,31.1 63.7,29.8 63.7,28.6 64.53,27.77 J10.11 | S2.4 S2.3 62.96,31.66 62.4,31.1
N$41
  Top 0.4: 19.91,12.49 19.75,12.65
  Top 0.5: R18.2 18.8,13.6 19.75,12.65 19.9,12.5 | J16.5 19.91,12.49
N$42
  Bottom 0.5: R13.2 7.8,11.2 11.06,14.46 Q18.2
N$43
  Top 1: IC12.18 111.46,8.94 111.79,8.61 J7.2
N$44
  Top 1: IC12.17 108.92,8.98 109.25,8.65 J7.3
N$45
  Top 1: IC12.16 106.38,9.02 106.71,8.69 J7.4
N$46
  Top 1: IC12.15 103.84,8.96 104.17,8.63 J7.5
N$47
  Top 1: IC12.14 101.3,8.9 101.63,8.57 J7.6
N$48
  Top 1: IC12.13 98.76,9.24 99.09,8.91 J7.7
N$49
  Top 1: IC12.12 96.22,9.42 96.2,9.4 96.55,9.05 J7.8
N$50
  Top 1: J7.10 91.47,7.57 93.68,9.78 IC12.11
N$51  (via drill 0.55)
  Top 0.5: S1.4 S1.3 14.6,38.71 v14.6,34.4 14.6,24.9 8.52,18.82 Q18.3 | v19.4,29.6 21.27,27.73 J16.11
  Bottom 0.5: Q18.3 8.52,15.33 R18.1 | v19.4,29.6 v14.6,34.4
N$59
  Top 1: IC11.18 127.14,34.96 129.41,32.69 J6.2
N$60
  Top 1: IC11.17 126.78,32.42 129.05,30.15 J6.3
N$61
  Top 1: IC11.16 126.82,29.88 129.09,27.61 J6.4
N$62
  Top 1: IC11.15 126.66,27.34 128.93,25.07 J6.5
N$63
  Top 1: IC11.14 126.6,24.8 128.87,22.53 J6.6
N$64
  Top 1: IC11.13 126.34,22.26 128.05,20.55 128.3,20.3 128.61,19.99 J6.7
N$65
  Top 1: IC11.12 126.48,19.72 131.29,14.91 J6.9
N$66
  Top 1: IC11.11 126.22,17.18 131.03,12.37 J6.10
N$67
  Top 1: J4.3 129.25,82.75 127.96,81.46 IC9.18
N$68
  Top 1: IC9.17 127.72,78.92 129.01,80.21 J4.4
N$69
  Top 1: IC9.16 127.88,76.38 129.17,77.67 J4.5
N$70
  Top 1: IC9.15 128.14,73.84 129.43,75.13 J4.6
N$71
  Top 1: IC9.14 128.1,71.3 129.39,72.59 J4.7
N$72
  Top 1: IC9.13 127.96,68.76 128.25,69.05 128.6,69.4 129.25,70.05 J4.8
N$73
  Top 1: IC9.12 128.22,66.22 129.51,67.51 J4.9
N$74
  Top 1: IC9.11 127.98,63.68 129.27,64.97 J4.10
N$75
  Top 1: IC10.18 128.16,58.26 128.89,58.99 J5.2
N$76
  Top 1: IC10.17 127.92,55.72 128.1,55.9 128.4,56.2 128.65,56.45 J5.3
N$77
  Top 1: IC10.16 128.58,53.18 129.31,53.91 J5.4
N$78
  Top 1: IC10.15 128.34,50.64 129.07,51.37 J5.5
N$79
  Top 1: IC10.14 128.3,48.1 129.03,48.83 J5.6
N$80
  Top 1: IC10.13 128.24,45.56 128.55,45.25 128.9,44.9 130.05,43.75 J5.8
N$81
  Top 1: IC10.12 127.48,43.02 129.29,41.21 J5.9
N$82
  Top 1: IC10.11 127.02,40.48 128.83,38.67 J5.10
OUT13
  Top 2.5: Q1.2 6.8,81.4 7.7,82.3 7.7,87.9 13.5,93.7 J1.1
OUT14
  Top 2.5: Q2.2 13.2,81.5 14.4,82.7 14.4,86.3 18.42,90.32 J1.2
OUT15
  Top 2.5: Q3.2 20.1,81.4 21.1,82.4 21.1,87.4 23,89.3 23.35,89.65 26.35,92.65 J1.4
OUT16
  Top 2.5: Q4.2 26.8,81.4 28,82.6 28,88.8 30.31,91.11 J1.5
OUT17
  Top 2.5: Q5.2 33.2,81.4 34.7,82.9 34.7,89.3 34.27,89.73 J1.6
OUT18
  Top 2.5: Q6.2 40.3,81.4 41.6,82.7 41.6,87.2 38.23,90.57 J1.7
OUT19
  Top 2.5: Q7.2 47.4,81.4 48.4,82.4 48.4,85.9 45.6,88.7 45.25,89.05 42.19,92.11 J1.8
OUT20
  Top 2.5: Q8.2 54.2,81.4 55.2,82.4 55.2,86.5 51.5,90.2 51.15,90.55 48,93.7 J1.9
OUT21
  Top 2.5: Q9.2 61.2,81.4 62.2,82.4 62.2,89.6 66.3,93.7 J2.1
OUT22
  Top 2.5: Q10.2 68.2,81.4 69.1,82.3 69.1,88.3 72.72,91.92 J2.2
OUT23
  Top 2.5: Q11.2 75,81.4 75.6,82 75.6,82.1 75.9,82.4 75.9,86.7 76.68,87.48 J2.3
OUT24
  Top 2.5: Q12.2 81.3,81.4 82.6,82.8 82.6,90 84.61,92.01 J2.5
OUT25
  Top 2.5: Q13.2 88,81.4 89.4,82.8 89.4,86.1 88.57,86.93 J2.6
OUT26
  Top 2.5: Q14.2 95,81.4 96.2,82.6 96.2,85.7 92.53,89.37 J2.7
OUT27
  Top 2.5: Q15.2 102.1,81.4 103,82.3 103,85.1 101.3,86.8 99.4,86.8 96.49,89.71 J2.8
OUT28
  Top 2.5: Q16.2 108.5,81.4 109.9,82.8 109.9,85.3 108.3,86.9 105.7,86.9 100.46,92.14 J2.9
OUTCTL13
  Top 0.4: IC1.2 6.63,61.37 16,52 16,22.8 21.1,17.7 23.4,17.7 | 23.82,17.58 23.7,17.7 23.4,17.7 | J16.7 23.53,17.57 23.4,17.7
OUTCTL14  (via drill 0.45)
  Top 0.4: v20.6,20.6 16.8,24.4 16.8,52.3 11.71,57.39 IC1.4 | v32.3,20.6 32.4,20.6 35.2,17.8 35.2,8.8 39.12,4.88 J15.2
  Bottom 0.4: v20.6,20.6 v32.3,20.6
OUTCTL15  (via drill 0.45)
  Top 0.4: IC2.2 19.83,56.63 17.5,54.3 17.5,27.2 v20.6,24.1 | v30.2,21.7 30.7,21.2 30.7,6.9 34.55,3.05 35.26,2.34 J15.1
  Bottom 0.4: v20.6,24.1 27.8,24.1 v30.2,21.7
OUTCTL16
  Top 0.4: 24.91,62.69 24.91,60.41 18.4,53.9 18.4,35 23.12,30.28 J16.12
  Top 0.5: IC2.4 24.91,62.69
OUTCTL17
  Top 0.4: IC3.2 33.03,61.53 30.9,59.4 25.1,59.4 19.2,53.5 19.2,39.1 22.94,35.36 J16.14
OUTCTL18
  Top 0.4: IC3.4 38.11,61.41 35.4,58.7 25.6,58.7 20,53.1 20,41 23.1,37.9 J16.15
OUTCTL19
  Top 0.4: IC4.2 46.23,61.13 43,57.9 26,57.9 20.9,52.8 20.9,42.5 22.96,40.44 J16.16
OUTCTL20
  Top 0.4: IC4.4 51.31,61.71 46.8,57.2 26.5,57.2 21.7,52.4 21.7,44.4 23.12,42.98 J16.17
OUTCTL21
  Top 0.4: IC5.2 59.43,62.73 57.9,61.3 52,61.3 47.1,56.4 26.9,56.4 22.4,51.9 22.4,49.4 23.75,48.05 J16.19
OUTCTL22
  Top 0.4: IC5.4 63.08,61.8 60.4,61.8 59.1,60.6 52.4,60.6 47.4,55.6 29.1,55.6 27.21,53.71 J16.20
OUTCTL23
  Top 0.4: IC6.2 69.3,59.9 52.7,59.9 44.98,52.18 J15.20
OUTCTL24
  Top 0.4: IC6.4 76.08,61.6 72,61.6 69.6,59.2 53.1,59.2 46.5,52.6 46.5,49.3 45.26,48.06 J15.19
OUTCTL25
  Top 0.4: IC7.2 83.5,60.9 72.3,60.9 69.9,58.5 53.5,58.5 47.3,52.3 47.3,44.1 46.18,42.98 J15.17
OUTCTL26
  Top 0.4: IC7.4 87.88,60.2 72.6,60.2 70.2,57.8 53.9,57.8 48.1,52 48.1,41.4 47.14,40.44 J15.16
OUTCTL27
  Top 0.4: IC8.2 95.3,59.5 73,59.5 70.6,57.1 54.3,57.1 48.9,51.7 48.9,40.5 47.8,39.4 47.45,39.05 46.3,37.9 J15.15
OUTCTL28
  Top 0.4: IC8.4 99.68,58.8 73.4,58.8 70.9,56.3 54.6,56.3 49.7,51.4 49.7,40 45.06,35.36 J15.14
SCL  (via drill 0.45)
  Top 0.4: 34.26,22.66 v34.3,22.7 34.25,22.65 J16.9 22.15,22.65 v22.1,22.7 | v56.7,22.7 58.2,22.7 | 58.2,22.7 63.97,22.7 63.98,22.69 J10.9 | IC13.6 59.07,23.57 58.2,22.7
  Bottom 0.4: v22.1,22.7 18.2,22.7 13.7,27.2 4.8,27.2 J8.3 | v34.3,22.7 v56.7,22.7
SDA  (via drill 0.45)
  Top 0.4: 60.9,25.23 60.83,25.23 v60.8,25.2 | IC13.5 61.61,25.94 60.9,25.23 | v40.7,25.2 J16.10 v21.9,25.2 | J10.10 60.9,25.23
  Bottom 0.4: v21.9,25.2 18.3,25.2 11.02,32.48 4.82,32.48 J8.5 | v40.7,25.2 v60.8,25.2
VBUS
  Bottom 1: D1.2 D2.2 18.2,17.9 13.89,22.21 J8.1

## Text on the board
tPlace: CR2032
tNames: HIGH POWER OUTPUTS 13-20 | HIGH POWER OUTPUTS 21-28 | 2ND PSU | 13 | 14 | X | 15 | 16 | 17 | 18 | 19 | 20 | 21 | 22 | 23 | X | 24 | 25 | 26 | 27 | 28 | GND | GND | GND | GND | 12V | 5V | 5V | X | 1 | 2 | 3 | LAMPS 1-8 | 4 | 5 | 6 | 7 | 8 | 5V | 9 | PINSCAPE / PICO | 10 | PWMWORKER 1 | PWMWORKER 2 | 11 | DIY POWER BOARD | REV 20250201 | 12 | LAMPS 9-16 | 13 | RESET 1 | X | 14 | RESET 2 | 15 | 16 | 5V | 17 | TO MAIN BOARD | 18 | 19 | 20 | LAMPS 17-24 | 21 | 22 | X | 23 | 24 | 32 | X | 31 | 30 | 29 | 28 | 27 | 26 | 25 | 5V | LAMPS 25-32